# Altium PCB SWDM-21DD8_LV_XX_V1.PcbDoc (part 2 of 2)
Units mil, origin at the board's own origin, x right, y up, seen from the top; angles counter-clockwise.
Board outline 3898.56 x 2933.86 mil, 2 copper layers (Top, Bottom), stack 12.7 mil thick; 138 components, 69 nets, 322 pads, 492 vias.
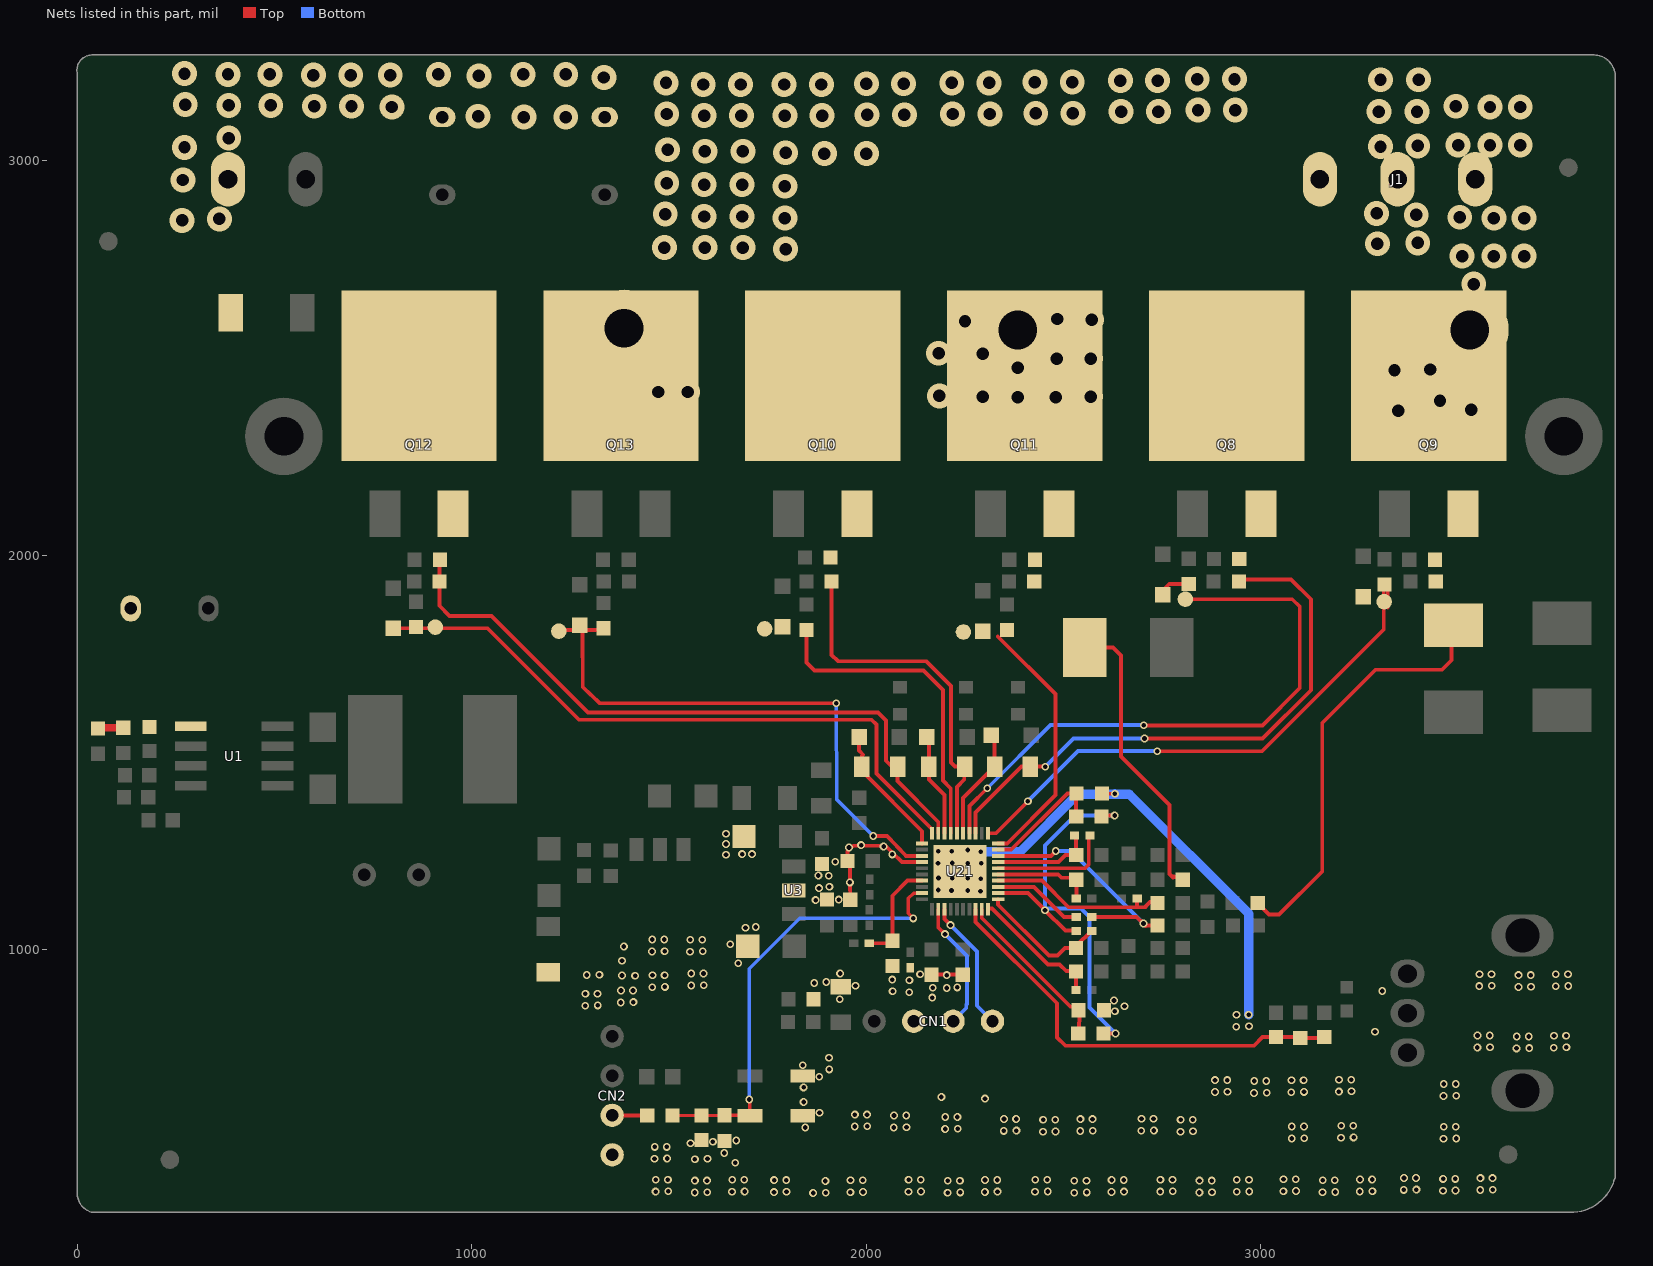
[diagram p2: the nets of this part, all layers, seen from the top]

## Via types
v1: diameter 19.68, hole 11.81, Top to Bottom, 314 vias
v2: diameter 62.99, hole 31.5, Top to Bottom, 174 vias
v3: diameter 39.37, hole 19.68, Top to Bottom, 4 vias

## Nets (pads, with @x,y where several pads share a name; then routed paths per layer and width w, separated by ;. In a path a pad name is that pad's centre, name@x,y a point inside that pad or via, vN(x,y) a via of type N, cw(c..) or ccw(c..) an arc to the next point about the centre after c; other vN are vias at no path point) (continued)
GND: C5.1 C7.1 C9.1 C10.1 C14.2 C15.1 C17.2 C21.2 C22.1 C23.1 C50.1 C65.2 C69.1 CN1.2 CN2.1 R11.2 R34.2 R81.2 R112.2 U3.2 U21.14 U21.41 ZD1.1 ZD2.1 | length 1575.1
  Top w9.84: C21.2@1959.06,1126.49 1958.68,1170.48 1958.27,1218.79 C7.1@1952.25,1224.8 1952.25,1248.71 1959.25,1255.71 1966.93,1263.39 2048.43,1263.39 2080.91,1230.91 2081.3,1230.91 2090.16,1222.05 U21.14@2140.94,1222.05 ; C69.1@2597.24,1395.67 v1(2629.92,1394.88)
  Top w10.24: C10.1@1900,1126.77 C10.1@1903.65,1130.43 ; C15.1@2165.35,936.5 C22.1@2244.09,936.5
  Bottom w23.62: v1(2290.16,1248.43) 2389.76,1248.43 2535.43,1394.09 2575.59,1394.09 v1@2629.13,1394.09 ; v1(2629.92,1394.88) v1@2629.13,1394.09 ; v1(2968.9,835.04) 2968.9,1091.34 2666.14,1394.09 v1@2629.13,1394.09
  other v1: 1864.96,383.07 1896.85,383.86 2205.91,383.86 2526.77,383.86 1564.96,384.25 2237.8,384.65 2558.66,384.65 2844.09,384.25 1596.85,385.04 1765.75,385.43 1959.45,385.04 1991.34,385.83 2300.39,385.83 2621.26,385.83 2875.98,385.04 3156.3,385.04 3188.19,385.83 1465.75,386.61 1659.45,386.22 1797.64,386.22 2106.69,386.22 2332.28,386.61 2427.56,386.22 2653.15,386.61 2744.88,386.61 2938.58,386.22 1497.64,387.4 1691.34,387.01 2138.58,387.01 2459.45,387.01 2776.77,387.4 2970.47,387.01 3057.09,387.4 3250.79,387.01 3282.68,387.8 3088.98,388.19 3461.42,388.58 3493.31,389.37 3555.91,390.55 3362.2,390.94 3394.09,391.73 3587.8,391.34 1896.06,413.39 1565.35,414.57 1596.06,414.57 2206.3,414.17 2237.01,414.17 2527.17,414.17 2557.87,414.17 2844.49,414.57 2875.2,414.57 1766.14,415.75 1796.85,415.75 1959.84,415.35 1990.55,415.35 3156.69,415.35 3187.4,415.35 1659.84,416.54 1690.55,416.54 2107.09,416.54 2137.8,416.54 2300.79,416.14 2331.5,416.14 2427.95,416.54 2458.66,416.54 2621.65,416.14 2652.36,416.14 2938.98,416.54 2969.68,416.54 1466.14,416.93 1496.85,416.93 2745.28,416.93 2775.98,416.93 3057.48,417.72 3088.19,417.72 3251.18,417.32 3281.89,417.32 3461.81,418.9 3492.52,418.9 3556.3,420.87 3587.01,420.87 3362.6,421.26 3393.31,421.26 1667.72,459.84 1565.35,468.9 1462.99,469.69 1597.24,469.69 1494.88,470.47 1639.76,484.65 1463.39,500 1494.09,500 1554.33,509.45 1611.02,512.99 1670.08,516.14 3462.99,520.47 3077.95,521.26 3494.88,521.26 3109.84,522.05 3203.15,523.23 3235.04,524.02 2447.64,538.19 2796.06,538.58 2479.53,538.98 2827.95,539.37 2348.43,540.55 2542.13,540.16 2380.32,541.34 2574.02,540.94 2696.85,540.94 2728.74,541.73 2199.61,545.28 2231.5,546.06 1845.28,549.21 2069.68,549.21 2101.57,550 3463.39,550.79 3494.09,550.79 1970.47,551.57 3078.35,551.57 3109.06,551.57 2002.36,552.36 3203.54,553.54 3234.25,553.54 2448.03,568.5 2478.74,568.5 2796.46,568.9 2827.17,568.9 2348.82,570.87 2379.53,570.87 2542.52,570.47 2573.23,570.47 2697.24,571.26 2727.95,571.26 2200,575.59 2230.71,575.59 2070.08,579.53 2100.79,579.53 1970.87,581.89 2001.57,581.89 1881.1,586.61 1840.94,613.78 2300.79,622.44 2190.16,626.38 3462.99,629.13 3494.88,629.92 2982.68,636.61 3014.57,637.4 3077.17,638.58 2883.46,638.98 2915.35,639.76 3109.06,639.37 3197.64,640.16 3229.53,640.94 1840.94,650.79 3463.39,659.45 3494.09,659.45 2983.07,666.93 3013.78,666.93 3077.56,668.9 3108.27,668.9 2883.86,669.29 2914.57,669.29 3198.03,670.47 3228.74,670.47 1880.71,677.95 1905.91,696.46 1838.58,707.09 1905.12,725.98 3648.03,749.61 3679.92,750.39 3742.52,751.57 3548.82,751.97 3580.71,752.76 3774.41,752.36 3648.43,779.92 3679.13,779.92 3742.91,781.89 3773.62,781.89 3549.21,782.28 3579.92,782.28 3289.37,792.13 2937.8,804.72 2969.68,805.51 2938.19,835.04 2629.92,843.7 2654.33,856.69 1287.4,857.87 1319.29,858.66 1377.56,866.14 1409.45,866.93 2627.56,870.87 1932.28,874.02 2166.93,878.35 1287.8,888.19 1318.5,888.19 2108.66,892.13 2066.54,894.49 3307.87,895.28 1377.95,896.46 1408.66,896.46 2203.94,902.76 2168.11,903.15 1457.48,904.72 2230.32,904.33 1489.37,905.51 3652.76,905.12 3684.65,905.91 3553.54,907.48 3747.24,907.09 3779.13,907.87 1972.44,908.27 3585.43,908.27 1555.91,909.06 1587.8,909.84 1868.11,915.35 1898.03,918.11 2109.06,922.44 2065.35,924.02 1413.78,933.86 1380.71,934.25 1291.34,935.83 1457.87,935.04 1488.58,935.04 2203.94,935.43 3653.15,935.43 3683.86,935.43 1323.23,936.61 2136.22,937.8 3553.94,937.8 3584.65,937.8 3747.64,937.4 3778.35,937.4 1556.3,939.37 1587.01,939.37 1933.46,939.37 1675.2,965.35 1380.71,972.05 1553.15,994.88 1456.69,995.28 1585.04,995.67 1488.58,996.06 1385.43,1007.87 1654.72,1013.78 1457.09,1025.59 1487.8,1025.59 1553.54,1025.2 1584.25,1025.2 1693.7,1055.51 1719.68,1057.48 1871.26,1125.59 1929.92,1126.77 2289.37,1147.64 2215.75,1150 2256.69,1150 2182.28,1151.18 1879.92,1155.91 1906.3,1159.45 1958.27,1170.47 2290.16,1179.53 2182.68,1181.5 2217.32,1181.1 2256.69,1181.1 1878.35,1187.8 1904.72,1187.01 2290.94,1218.9 2181.5,1219.29 2217.32,1219.69 2256.69,1219.29 1920.87,1222.83 1644.09,1240.55 2065.75,1241.34 1685.04,1242.13 1710.24,1242.13 2181.89,1249.61 2216.54,1249.21 2256.69,1252.36 1955.91,1259.06 2043.7,1261.42 1986.61,1264.96 1644.09,1267.72 1644.09,1293.7
HB1: C96.1 D4.2 U21.11 | length 338.7
  Top w9.84: D4.2@1981.5,1538.98 1981.5,1504.72 1992.13,1494.09 1988.58,1490.55 C96.1@1988.58,1463.78 1993.7,1458.66 1993.7,1447.24 2140.94,1300 U21.11@2140.94,1269.29
HB2: C11.1 D7.2 U21.8 | length 262.5
  Top w9.84: D7.2@2153.54,1538.98 2158.27,1534.25 C11.1@2158.27,1463.78 2158.27,1431.5 2198.03,1391.73 U21.8@2198.03,1294.88
HB3: C8.1 D9.2 U21.5 | length 285.4
  Top w9.84: U21.5@2245.28,1294.88 2245.28,1383.86 C8.1@2325.2,1463.78 2325.2,1535.43 D9.2@2316.14,1542.91
IBUSDET: C50.2 R20.2 U21.29 | length 435.6
  Top w9.84: U21.29@2292.52,1101.97 2292.52,1080.31 2517.69,855.14 2537.37,855.14 C50.2@2537.4,846.46 2541.62,849.32 2541.4,846.18 R20.2@2537.29,787.4
IV: C55.1 Q11.3 R26.1 R43.1 RS3.2 | length 744.7
  Top w10.24: RS3.2@2553.54,1766.14 2625.2,1766.14 2645.67,1745.67 2645.67,1489.37 2768.11,1366.93 2768.11,1192.13 2777.17,1183.07 2779.53,1185.43 R26.1@2801.69,1177.17
IW: C57.1 Q9.3 R7.1 R31.1 RS2.2 | length 1082.1
  Top w9.84: R31.1@2991.84,1118.11 3020.98,1088.98 3046.06,1088.98 3155.51,1198.43 3155.51,1574.8 3290.16,1709.45 3459.45,1709.45 3483.46,1733.46 3483.46,1817.72 RS2.2@3488.19,1822.44
OC: C69.2 R15.2 U21.39 | length 315.8
  Top w9.84: U21.39@2333.86,1253.54 2367.32,1253.54 2509.45,1395.67 C69.2@2532.28,1395.67 2531.78,1395.17 R15.2@2531.78,1337.4
OPA0+: R49.2 R137.1 U21.30 | length 337.6
  Top w7.87: U21.30@2308.27,1101.97 2308.46,1101.97 U21.30@2311.02,1104.53
  Top w9.84: 2489.76,962.6 2506.69,945.67 2530.6,945.67 R49.2@2531.39,944.88 2531.5,944.77 R137.1@2531.5,897.64
  Top w10.24: U21.30@2311.02,1104.53 2317.91,1104.53 2459.84,962.6 2489.76,962.6
OPA0-: R48.2 R52.2 U21.31 | length 334
  Top w9.84: U21.31@2333.86,1127.56 2333.86,1113.78 2462.99,984.65 2484.25,984.65 2503.54,1003.94 R48.2@2531.39,1003.94 2531.39,1010.91 R52.2@2571.65,1047.24
OPA0-OUT: R15.1 R20.1 R52.1 U21.32 | length 1124.5
  Top w9.84: U21.32@2333.86,1143.31 2409.45,1143.31 2452.76,1100 v1(2452.76,1099.61) 2453.15,1099.61 2504.72,1048.03 2529.53,1048.03 2530.32,1047.24 R52.1@2532.28,1047.24 ; R15.1@2595.78,1337.4 2598.54,1340.16 v1(2629.13,1340.16) ; R20.1@2601.29,787.4 v1(2631.5,787.4)
  Bottom w9.84: v1(2629.13,1340.16) 2628.74,1339.76 2528.74,1339.76 2452.76,1263.78 v1(2452.76,1099.61) 2453.15,1100 2453.15,1104.33 2544.49,1104.33 2565.75,1083.07 2565.75,853.15 v1(2631.5,787.4)
OPA1+: R25.2 R29.1 U21.34 | length 461.5
  Top w9.84: U21.34@2333.86,1174.8 2444.88,1174.8 2512.2,1107.48 2686.22,1107.48 ; R29.1@2686.22,1129.92 2686.22,1107.48 ; R25.2@2737.68,1118.11 2735.05,1118.71 2733.4,1120.37 2718.61,1120.37 2707.87,1109.64 2707.87,1107.48 2686.22,1107.48
OPA1-: R24.2 R28.2 U21.38 | length 626.1
  Top w9.84: U21.38@2333.86,1237.8 2467.72,1237.8 v1(2479.92,1250) ; R28.2@2571.65,1082.68 2685.43,1082.68 v1@2702.36,1065.75 ; v1(2702.36,1066.14) v1@2702.36,1065.75 ; R24.2@2737.68,1061.02 2709.45,1061.02 2708.27,1059.84 v1@2702.36,1065.75
  Bottom w9.84: v1(2479.92,1250) 2518.5,1250 v1(2702.36,1066.14)
OPA1-OUT: R28.1 U21.33 | length 230.1
  Top w9.84: U21.33@2333.86,1159.06 2424.8,1159.06 2501.18,1082.68 R28.1@2532.28,1082.68
OPA2+: R16.2 R22.1 U21.35 | length 252.9
  Top w9.84: U21.35@2333.86,1190.55 2486.22,1190.55 2494.68,1182.09 2530.8,1182.09 R16.2@2531.78,1177.17 2532.28,1176.66 R22.1@2532.28,1129.92
OPA2-: R13.2 R19.2 U21.37 | length 256.4
  Top w9.84: U21.37@2333.86,1222.05 2487.01,1222.05 2505.12,1240.16 R13.2@2531.78,1240.16 2531.78,1285.15 R19.2@2527.56,1289.37
OPA2-OUT: R19.1 U21.36 | length 309.8
  Top w9.84: U21.36@2333.86,1206.3 2554.33,1206.3 2563.78,1215.75 2563.78,1287.95 2564.49,1288.66 2564.49,1288.9 R19.1@2566.93,1289.37
PWM: C14.1 R34.1 R35.2 U21.19 ZD2.2 | length 1143.2
  Top w8.66: R35.2@1508.38,579.53 1647.24,579.53 C14.1@1646.46,580.31 ; C14.1@1640.16,580.31 C14.1@1646.46,580.31 ; v1(1703.15,620.08) 1704.72,618.5 ZD2.2@1704.72,578.74 1703.15,580.31 C14.1@1646.46,580.31 ; v1(2118.9,1079.13) 2106.3,1091.73 2106.3,1129.92 2119.68,1143.31 U21.19@2140.94,1143.31
  Bottom w8.66: v1(1703.15,620.08) 1703.15,951.18 1831.1,1079.13 v1(2118.9,1079.13)
SWCLK: CN1.3 U21.22 | length 328
  Top w9.84: U21.22@2182.28,1101.97 2182.28,1056.3 v1(2199.21,1039.37)
  Bottom w9.84: v1(2199.21,1039.37) 2254.72,983.86 2254.72,862.6 2253.22,861.09 2253.22,852.03 CN1.3@2219.68,818.5
SWDIO: CN1.4 U21.23 | length 333.9
  Top w9.84: U21.23@2198.03,1101.97 2198.03,1077.56 v1(2213.39,1062.2)
  Bottom w9.84: v1(2213.39,1062.2) 2280.32,995.28 2280.32,857.87 CN1.4@2319.68,818.5
U: C3.1 C96.2 J1.1 Q12.3 Q13.2 R51.1 T1.1 U21.9 | length 1849.8
  Top w9.84: R51.1@919.29,1933.07 R51.1@917.83,1933.07 ; C3.1@919.29,1988.19 917.83,1986.72 R51.1@917.83,1939.83 ; R51.1@920.8,1939.83 R51.1@917.83,1939.83 ; v2(1547.24,2413.39) 1549.72,2410.91 Q13.2@1549.72,2291.34 ; U21.9@2182.28,1294.88 2182.28,1323.62 2078.74,1427.17 2078.74,1463.39 C96.2@2079.13,1463.78 2072.05,1463.78 2068.5,1460.24 2050,1478.74 2050,1581.1 2029.92,1601.18 1294.09,1601.18 1049.61,1845.67 943.81,1845.67 917.83,1871.65 R51.1@917.83,1933.07 ; R51.1@917.83,1933.07 R51.1@917.83,1939.83
  other v2: 1472.44,2413.39
U1-RST: C17.1 R30.2 U21.17 | length 271.2
  Top w9.84: R30.2@2007.09,1016.14 2064.57,1016.14 2064.57,1020.58 C17.1@2066.54,1022.55 2062.99,1035.43 2066.14,1038.58 2066.14,1136.61 2104.33,1174.8 U21.17@2140.94,1174.8
U-H: D10.2 R65.1 U21.10 U-H.1 | length 1660
  Top w9.84: D10.2@800.79,1814.17 801.18,1814.57 1039.76,1814.57 1271.65,1582.68 2013.39,1582.68 2025.59,1570.47 2025.59,1446.06 2166.54,1305.12 U21.10@2166.54,1294.88
U-L: D5.2 R66.1 U21.13 U-L.1 | length 1453.9
  Top w9.84: U-L.1@1220.47,1807.09 1223.91,1810.52 D5.2@1280.72,1810.52 ; D5.2@1273.62,1822.05 1280.32,1815.35 1280.71,1814.17 1280.71,1812.99 D5.2@1280.72,1810.52 ; R66.1@1334.25,1814.06 R66.1@1333.46,1814.85 1314.17,1810.52 D5.2@1280.72,1810.52 ; v1(1923.62,1624.41) 1324.41,1624.41 1281.1,1665.75 D5.2@1280.72,1810.52 ; v1(2017.32,1288.19) 2052.56,1288.19 2100.59,1237.8 U21.13@2140.94,1237.8
  Bottom w9.84: v1(1923.62,1624.41) 1924.91,1380.82 v1(2017.32,1288.19)
V: C11.2 C54.1 J1.2 Q10.3 Q11.2 R21.1 T3.1 U21.6 | length 930.3
  Top w9.84: R21.1@1911.92,1933.07 1911.92,1747.24 1928.06,1731.1 2151.18,1731.1 2214.17,1668.11 2214.17,1474.8 2224.8,1464.17 2248.43,1464.17 C11.2@2248.82,1463.78 2248.03,1462.99 2248.03,1431.1 2229.53,1412.6 U21.6@2229.53,1294.88
  other v2: 2383.86,2399.61 2480.32,2399.61 2295.28,2401.57 2568.9,2401.57 2185.04,2403.54 2383.86,2474.41 2482.28,2498.03 2568.9,2498.03 2295.28,2509.84 2183.07,2511.81 2250,2592.52 2570.87,2596.46 2484.25,2598.43 3295.28,2789.37 3397.64,2791.34 3393.7,2862.2 3293.31,2866.14 3303.15,3035.43 3397.64,3037.4 3299.21,3124.02 3395.67,3124.02 3303.15,3204.72 3399.61,3204.72
V-H: D22.2 R63.1 U21.7 V-H.1 | length 828.6
  Top w9.84: R63.1@1848.43,1810.52 1848.43,1727.56 1868.9,1707.09 2144.88,1707.09 2194.09,1657.87 2194.09,1428.35 2213.78,1408.66 U21.7@2213.78,1294.88
V-L: D23.2 R64.1 U21.40 V-L.1 | length 666.5
  Top w9.84: 2332.91,1793.98 2336.33,1790.55 2479.33,1647.56 2479.33,1391.54 2357.09,1269.29 U21.40@2333.86,1269.29 ; R64.1@2356.3,1810.52 2359.84,1806.98 R64.1@2359.84,1804.72
VDD: C16.1 C19.1 C25.2 C29.1 D8.1 J6.1 Q8.2 Q10.2 Q12.2 R8.2 R80.2 U1.1 | length 64.8
  Top w19.68: R80.2@52.36,1560.74 53.94,1562.31 C25.2@116.54,1562.31
  other v2: 1795.28,2775.59 1488.19,2779.53 1590.55,2779.53 1687.01,2779.53 265.75,2848.43 360.24,2852.36 1793.31,2854.33 1588.58,2858.27 1685.04,2858.27 1490.16,2864.17 1793.31,2935.04 1588.58,2938.98 1685.04,2938.98 1494.09,2942.91 267.72,2950.79 1893.7,3017.72 2000,3017.72 1795.28,3019.69 1590.55,3023.62 1687.01,3023.62 1496.06,3027.56 271.65,3033.46 383.86,3057.09 1131.89,3110.24 1238.19,3110.24 1015.75,3112.2 1588.58,3114.17 1683.07,3114.17 1793.31,3114.17 1887.8,3114.17 2001.97,3116.14 2096.46,3116.14 1494.09,3118.11 2218.5,3118.11 2312.99,3118.11 2429.13,3120.08 2523.62,3120.08 2645.67,3124.02 2740.16,3124.02 2840.55,3127.95 2935.04,3127.95 797.24,3135.83 600.39,3137.8 694.88,3137.8 383.86,3139.76 490.16,3139.76 273.62,3141.73 1586.61,3192.91 1681.1,3192.91 1791.34,3192.91 1885.83,3192.91 2000,3194.88 2094.49,3194.88 1492.13,3196.85 2216.54,3196.85 2311.02,3196.85 2427.17,3198.82 2521.65,3198.82 2643.7,3202.76 2738.19,3202.76 2838.58,3206.69 2933.07,3206.69 1334.65,3210.63 1017.72,3214.57 598.43,3216.54 692.91,3216.54 793.31,3216.54 381.89,3218.5 488.19,3218.5 915.35,3218.5 1129.92,3218.5 1238.19,3218.5 271.65,3220.47
VSP: C39.1 R1.1 R14.1 U21.28 | length 1109.8
  Top w9.84: U21.28@2276.77,1101.97 2276.77,1070.47 2483.07,864.17 2483.07,777.56 2504.33,756.3 2982.28,756.3 3004.33,778.35 R1.1@3038.19,778.35 3096.85,778.35 C39.1@3099.61,775.59 3161.02,775.59 3161.02,777.95 R14.1@3160.63,778.35
VSP2: CN2.2 R35.1 | length 88.9
  Top w9.84: CN2.2@1355.51,579.92 1432.57,579.92 R35.1@1444.38,579.53
W: C8.2 C56.1 J1.3 Q8.3 Q9.2 R10.1 T4.1 U21.3 | length 1491.4
  Top w9.84: U21.3@2276.77,1294.88 2276.77,1347.64 2392.91,1463.78 C8.2@2415.75,1463.78 ; C8.2@2415.75,1445.67 C8.2@2415.75,1463.78 ; v1(2453.54,1463.78) C8.2@2415.75,1463.78 ; v1(2705.12,1535.04) 3004.33,1535.04 3126.77,1657.48 3126.77,1888.19 3076.38,1938.58 2950.39,1938.58 C56.1@2944.88,1933.07 C56.1@2943.7,1931.89 ; C56.1@2942.91,1931.1 C56.1@2943.7,1931.89 ; C56.1@2943.7,1928.23 C56.1@2943.7,1931.89
  Bottom w9.84: v1(2453.54,1463.78) 2524.8,1535.04 v1(2705.12,1535.04)
  other v2: 3348.43,2366.14 3533.46,2368.11 3453.94,2390.94 3338.58,2468.5 3429.13,2470.47 3539.37,2687.01 3509.84,2757.87 3590.55,2757.87 3667.32,2757.87 3590.55,2854.33 3667.32,2854.33 3503.94,2856.3 3500,3039.37 3580.71,3039.37 3657.48,3039.37 3580.71,3135.83 3657.48,3135.83 3494.09,3137.8
W-H: D24.2 R58.1 U21.4 W1-H.1 | length 1619.8
  Top w9.84: U21.4@2261.02,1294.88 2261.02,1363.78 v1(2306.3,1409.06) ; v1(2703.15,1568.5) 3003.94,1568.5 3098.43,1662.99 3098.43,1869.29 3079.53,1888.19 W1-H.1@2808.66,1888.19 ; D24.2@2749.21,1901.97 D24.2@2750.79,1899.61 D24.2@2757.09,1916.07 ; D24.2@2757.07,1916.09 2767.64,1926.66 R58.1@2816.93,1926.66
  Bottom w9.84: v1(2306.3,1409.06) 2466.93,1569.69 2701.97,1569.69 v1(2703.15,1568.5)
W-L: D25.2 R59.1 U21.1 W1-L.1 | length 1400
  Top w9.84: U21.1@2308.27,1294.88 2328.35,1294.88 v1@2409.45,1375.98 ; v1(2737.4,1502.76) 3002.76,1502.76 3311.42,1811.42 3311.42,1923.91 R59.1@3312.99,1925.48 3321.66,1925.57 W1-L.1@3321.66,1867.2 ; v1@2409.45,1375.98 2409.65,1376.18 v1(2409.45,1376.38) v1@2409.45,1375.98
  Bottom w9.84: v1(2409.45,1376.38) 2536.22,1503.15 2737.01,1503.15 v1(2737.4,1502.76)
pads on no net: CN2.4 MARK1.1 MARK2.1 MARK3.1 MARK4.1 T2.1 T6.1 U21.24 U21.25 VR1.4 VR1.5

## Polygon pours and split planes (outlines as drawn)
GND on Top "Top-GND" (solid, remove dead copper, pour order 0): 2220,1260 1946.77,1260 1735.75,1048.98 1311.73,1048.98 1175.12,912.36 1175.12,352.91 3767.24,352.91 3882.2,480.08 3882.2,1109.61 2657.01,1109.61 2417.24,1259.61 2220,1259.61
GND on Bottom "Bottom-GND" (solid, remove dead copper, pour order 2): 2205,1315 1931.77,1315 1720.75,1316.18 1160.12,1320.12 1160.12,358.31 3752.24,358.31 3867.2,485.47 3867.2,1115 3023.11,1115 2838.46,1314.21 2205,1314.21

## Keep-outs
Keep-Out Layer:
  lines w10: 0,383.83 ccw(c48.6,381.62) 39.4,333.85 ; 0,383.86 0,3220.47 cw(c37.62,3229.15) 39.37,3267.72 3844.49,3267.72 ; 27.56,472.44 169.29,472.44 ; 39.37,333.86 3792.99,333.86 ccw(c3784.46,449.99) 3897.64,422.61 3897.64,3220.47 ; 39.37,3110.24 196.85,3110.24 ; 3708.66,472.44 3850.39,472.44 ; 3708.66,3110.24 3850.39,3110.24 ; 3844.46,3267.72 cw(c3843.5,3213.09) 3897.63,3220.5

## Other copper
Top:
  region net VDD: 237.71,3240.64 220.08,3222.92 220.08,3009.06 142.91,2932.28 142.91,1973.23 77.95,1895.67 77.95,1544.88 330.71,1544.88 330.71,1586.22 139.54,1586.1 136.03,1590.68 132.21,1599.89 130.91,1609.77 132.21,1619.65 136.03,1628.86 140.19,1634.28 140.22,1634.25 236.22,1635.43 236.22,2448.43 453.15,2589.76 453.15,3000 508.27,3055.12 1415.35,3055.12 1446.85,3023.62 1446.85,2877.17 1415.35,2845.67 708.66,2845.67 655.51,2792.52 655.51,2265.75 683.07,2238.19 1000,2238.19 1059.06,2297.24 1059.06,2651.57 1102.36,2694.88 1606.3,2694.88 1643.7,2657.48 1643.7,2291.34 1681.1,2253.94 2045.28,2253.94 2086.61,2295.28 2086.61,2683.07 2112.2,2708.66 2687.01,2708.66 2704.72,2690.94 2704.72,2269.69 2734.25,2240.16 3094.49,2240.16 3114.17,2259.84 3114.17,2633.86 3009.84,2751.97 3009.84,3186.69 2942.59,3253.61 237.71,3240.64
  region net COM: 3330.71,1640.16 3564.17,1640.16 3564.17,1414.57 3533.46,1383.86 3355.91,1383.86 3330.71,1409.06 3330.71,1640.16
  region net IW: 3546.06,2163.78 3419.68,2163.78 3419.68,1785.43 3590.55,1785.43 3590.55,2164.17 3546.06,2164.17 3546.06,2163.78
  region net $$$8: 790.55,2160.63 778.74,2148.82 778.74,2041.34 777.56,1998.03 777.56,1866.14 789.37,1854.33 860.24,1854.33 872.05,1866.14 872.05,2148.82 860.24,2160.63 790.55,2160.63
  region net A-GND: 519.68,3013.78 541.34,3035.43 1364.17,3035.43 1379.92,3019.69 1379.92,2894.88 1348.43,2863.39 557.09,2863.39 519.68,2900.79 519.68,3013.78
  region net $$$6: 1765.75,2185.04 1753.94,2173.23 1753.94,1883.86 1765.75,1872.05 1854.33,1872.05 1866.14,1883.86 1866.14,2173.23 1854.33,2185.04 1765.75,2185.04
  region net $$$14301: 485.04,1585.83 485.04,1515.75 549.21,1515.75 570.08,1536.61 735.83,1536.61 735.83,1608.66 507.87,1608.66 485.04,1585.83
  region net A-GND: 674.41,1220.47 674.41,1001.57 712.6,963.39 1102.56,963.39 1210.04,1070.87 1520.47,1070.87 1520.47,1199.21 1197.83,1199.21 1023.43,1024.8 805.51,1024.8 777.17,1053.15 777.17,1220.47 674.41,1220.47
  region net A-GND: 271.26,1761.81 271.26,1663.78 299.61,1635.43 345.28,1635.43 352.76,1627.95 352.76,1398.82 325.59,1371.65 308.66,1371.65 308.66,1114.96 779.64,1114.96 773.62,1321.65 644.09,1321.65 644.09,1472.44 462.99,1472.44 431.89,1503.54 431.89,1702.76 372.83,1761.81 271.26,1761.81
  region net 12V: 1527.17,1416.54 1520.08,1409.45 1520.08,1227.95 1564.96,1227.95 1564.96,1345.67 1571.65,1352.36 1686.61,1352.36 1692.13,1357.87 1692.13,1411.02 1686.61,1416.54 1527.17,1416.54
  region net $$$5: 3307.09,2163.39 3301.18,2157.48 3301.18,2035.04 3283.46,2017.32 3261.81,2017.32 3255.91,2011.42 3255.91,1978.35 3261.81,1972.44 3354.33,1972.44 3358.27,1968.5 3358.27,1923.23 3366.14,1915.35 3385.43,1915.35 3393.31,1923.23 3393.31,2159.45 3389.37,2163.39 3307.09,2163.39
  region net A-GND: 535.04,2590.94 269.29,2422.83 269.29,1751.97 381.1,1751.97 381.1,2089.37 381.5,2192.52 381.5,2370.87 512.2,2469.29 636.61,2469.29 636.61,2591.34 535.04,2591.34 535.04,2590.94
  region net V: 3271.65,3255.91 3255.91,3240.16 3255.91,2759.84 3297.24,2718.5 3391.73,2718.5 3438.98,2765.75 3438.98,3234.25 3417.32,3255.91 3271.65,3255.91
  region net IV: 2427.17,2185.04 2419.29,2177.17 2419.29,1835.43 2496.06,1754.33 2496.06,1698.03 2503.94,1690.16 2608.36,1690.16 2608.75,1953.52 2608.27,1953.57 2608.27,2177.17 2600.39,2185.04 2427.17,2185.04
  region net V-H: 1732.68,1830.31 1862.6,1830.31 1862.6,1785.04 1732.68,1785.04 1732.68,1830.31
  region net U: 3053.15,3255.91 3037.4,3240.16 3037.4,2755.91 3078.74,2714.57 3183.07,2714.57 3230.32,2761.81 3230.32,3234.25 3208.66,3255.91 3053.15,3255.91
  region net 15V: 980.71,1642.52 980.71,1375.2 840.55,1244.49 840.55,1156.69 903.54,1156.69 1108.66,1358.66 1108.66,1642.52 980.71,1642.52
  region net W: 3474.41,3236.22 3458.66,3220.47 3458.66,2718.5 3421.26,2667.32 3421.26,2531.5 3448.82,2503.94 3590.55,2503.94 3624.02,2537.4 3622.05,2543.31 3700.79,2679.13 3698.82,3210.63 3692.91,3216.54 3675.2,3236.22 3474.41,3236.22
  region net A-GND: 3651.18,2177.17 3880.71,2177.17 3880.71,1779.53 3651.18,1779.53 3651.18,2177.17
  region net $$$7: 2285.43,2163.39 2277.56,2155.51 2277.56,1868.11 2285.43,1860.24 2374.02,1860.24 2379.92,1866.14 2379.92,2151.57 2368.11,2163.39 2285.43,2163.39
  region net COM: 3668.5,1652.36 3668.5,1207.09 3877.56,1207.09 3877.56,1652.36 3668.5,1652.36
  region net W-H: 2731.89,1944.88 2833.07,1944.88 2833.07,1877.56 2731.89,1877.56 2731.89,1944.88
  region net $$$11024: 1803.15,1410.24 1793.31,1400.39 1793.31,1215.75 1808.27,1200.79 1826.38,1200.79 1833.86,1208.27 1833.86,1396.85 1820.47,1410.24 1803.15,1410.24
  region net 5V: 1785.04,1105.12 1785.04,985.04 1918.11,985.04 1918.11,1029.13 1931.89,1042.91 2033.46,1042.91 2033.46,1081.89 1880.71,1081.89 1869.68,1070.87 1869.68,1045.67 1862.6,1038.58 1834.25,1038.58 1826.77,1046.06 1826.77,1105.12 1785.04,1105.12
  region net V-L: 2224.41,1831.1 2381.1,1831.1 2381.1,1788.98 2224.41,1788.98 2224.41,1831.1
  region net U: 1187.01,2661.42 1116.14,2661.42 1094.49,2639.76 1094.49,2240.16 1072.83,2218.5 937.01,2218.5 897.64,2179.13 897.64,1919.29 923.23,1893.7 1167.32,1893.7 1216.54,1942.91 1216.54,2145.67 1253.94,2183.07 1545.28,2183.07 1572.83,2210.63 1572.83,2645.67 1555.12,2663.39 1187.01,2663.39 1187.01,2661.42
  region net GND: 1740.63,1305.33 1659.06,1317.72 1649.61,1308.27 1649.61,1069.69 1625.98,1046.06 1296.79,1046.06 1203.87,969.69 1165.75,969.69 1165.75,851.57 1177.95,839.37 1660.24,839.37 1730.32,909.45 1730.32,1102.36 1761.81,1133.86 1862.99,1133.86 1884.25,1112.6 1971.26,1114 1971.26,1235.43 1958.66,1248.03 1881.1,1248.03 1870.08,1237.01 1870.08,1183.46 1861.81,1175.2 1768.5,1175.2 1753.15,1190.55 1753.15,1281.5 1740.63,1305.33
  region net V: 2222.44,2669.29 2151.57,2669.29 2129.92,2647.64 2129.92,2242.13 2108.27,2220.47 1927.17,2220.47 1887.8,2181.1 1887.8,1940.94 1913.39,1915.35 2212.6,1915.35 2261.81,1964.57 2261.81,2175.2 2299.21,2212.6 2580.71,2212.6 2608.27,2240.16 2608.27,2653.54 2590.55,2671.26 2222.44,2671.26 2222.44,2669.29
  region net W: 3240.16,2669.29 3169.29,2669.29 3147.64,2647.64 3147.64,2242.13 3125.98,2220.47 2954.72,2220.47 2915.35,2181.1 2915.35,1948.82 2940.94,1923.23 3118.11,1923.23 3275.59,2082.04 3275.59,2161.42 3312.99,2198.82 3582.68,2198.82 3610.24,2226.38 3610.24,2653.54 3592.52,2671.26 3240.16,2671.26 3240.16,2669.29
  region net COM: 2762.99,1841.73 3066.93,1841.73 3066.93,1684.65 2762.99,1684.65 2762.99,1841.73
  region net W-L: 3233.46,1944.09 3331.89,1944.09 3331.89,1854.33 3233.46,1854.33 3233.46,1944.09
  region net $$$28194: 2887.4,2147.64 2871.65,2163.39 2740.16,2163.39 2730.32,2153.54 2730.32,1984.25 2738.19,1976.38 2846.46,1976.38 2852.36,1970.47 2852.36,1929.13 2862.2,1919.29 2877.56,1919.29 2887.4,1929.13 2887.4,2147.64
  region net $$$9: 1263.78,2161.42 1253.94,2151.57 1253.94,1883.86 1267.72,1870.08 1338.58,1870.08 1346.46,1877.95 1346.46,2149.61 1334.65,2161.42 1263.78,2161.42
  region net A-GND: 523.62,2996.06 523.62,2562.99 541.34,2545.28 622.05,2545.28 637.8,2561.02 637.8,2978.35 614.17,3001.97 529.53,3001.97 523.62,2996.06
  region net COM: 1606.3,2145.67 1588.58,2163.39 1393.7,2163.39 1379.92,2149.61 1379.92,1789.76 1397.64,1772.05 1586.61,1772.05 1606.3,1791.73 1606.3,2145.67
Bottom:
  region net A-GND: 507.87,3015.75 519.68,3027.56 1364.17,3027.56 1387.8,3003.94 1387.8,2897.02 1220.47,2711.81 1220.47,2364.96 1287.4,2298.03 3556.88,2298.03 3652.94,2185.43 3853.5,2185.43 3874.02,2153.02 3874.02,1875.01 3843.48,1805.51 3144.03,1805.51 2981.43,1975.2 1037.01,1975.2 834.65,2139.37 834.65,2713.39 797.24,2750.79 559.06,2750.79 507.87,2801.97 507.87,3015.75
  region net V: 3250,2795.28 3167.32,2702.76 2279.33,2702.76 2068.9,2511.45 2068.9,2397.64 2100.39,2366.14 3090.55,2366.14 3438.98,2669.29 3438.98,3234.25 3419.29,3253.94 3255.91,3253.94 3250,3228.35 3250,2795.28
  region net VDD: 246.06,2812.99 228.35,2830.71 228.35,3228.35 255.91,3255.91 3015.75,3255.91 3015.75,3118.11 3015.52,3070.87 2200.79,3070.87 1771.65,2718.5 1476.38,2718.5 1444.88,2750 1444.88,3049.21 1419.29,3074.8 513.78,3074.8 468.5,3029.53 468.5,2854.33 427.17,2812.99 246.06,2812.99
  region net W: 3480.32,3249.61 3454.72,3224.02 3454.72,2639.76 3287.4,2472.44 3287.4,2370.47 3324.8,2333.07 3566.93,2333.07 3592.52,2358.66 3592.52,2398.62 3698.82,2504.92 3698.82,3216.14 3665.35,3249.61 3480.32,3249.61
  region net U: 1340.55,2688.98 1281.5,2629.92 1281.5,2403.54 1343.34,2346.46 1793.65,2346.46 1816.69,2354.97 2259.84,2734.25 3157.48,2734.25 3220.47,2797.24 3220.47,3019.69 3192.91,3047.24 2196.85,3047.24 1781.5,2688.98 1340.55,2688.98
  region net COM: 1306.69,1937.01 2937.99,1937.01 3136.02,1738.98 3879.13,1738.98 3879.13,1161.42 3183.96,1161.42 2641.83,1703.54 1306.69,1703.54 1306.69,1937.01
Multi-Layer:
  lines w1: 1.97,-259.84 1.99,-259.84 ; 3863.39,328.35 3863.41,328.35 ; 3897.64,-291.34 3897.66,-291.34 ; 3929.13,3269.69 3929.16,3269.69
  lines w10: 1.97,-209.84 1.97,4.72 ; 1766.39,-45.28 1.97,-45.28 ; 2133.21,-45.28 3897.64,-45.28 ; 3897.64,-241.34 3897.64,4.72 ; 3913.39,328.35 4737.01,328.35 ; 3979.13,3269.69 4737.01,3269.69 ; 4687.01,1731.52 4687.01,328.35 ; 4687.01,1866.52 4687.01,3269.69 ; 1.97,-45.28 101.97,-70.28 101.97,-20.28 1.97,-45.28 ; 3897.64,-45.28 3797.64,-20.28 3797.64,-70.28 3897.64,-45.28 ; 4687.01,328.35 4712.01,428.35 4662.01,428.35 4687.01,328.35 ; 4687.01,3269.69 4662.01,3169.69 4712.01,3169.69 4687.01,3269.69
  text "74.7mm" at 4530.19,1761.52 h50
  text "99.0mm" at 1796.39,-82.78 h50

## Silkscreen, mask and mechanical layers (free items; w line width, h text height)
Silkscreen Top:
  drawing of 17266 lines, arcs and shapes, not listed
  text "V" at 3309.45,2746.85 h118.11
  text "U" at 3112.99,2741.73 h118.11
  text "W" at 3505.91,2739.37 h118.11
  text "U" at 1446.85,2704.72 h118.11
  text "V" at 2606.3,2631.89 h118.11
  text "24-60V" at 20,2580 h110.24
  text "SWDM-21DD8_LV_XX_V1.2" at 65,735 h90
  text "CLK" at 2200,699.21 h29.53
  text "GND" at 2080.32,697.24 h29.53
  text "SWDIO" at 2319.68,697.24 h29.53
  text "5V" at 1981.1,690.16 h29.53
  text "FG" at 1192.52,650 h78.74
  text "2023-7-26" at 50,625 h100
  text "PWM" at 1184.65,548.82 h78.74
  text "速度调节" at 3227.56,540.94 h78.74
  text "GND" at 1185.83,452.76 h78.74
Solder Mask Bottom:
  region: 3265.75,2783.07 3171.26,2688.58 2283.27,2688.58 2091.34,2507.52 2091.34,2412.6 2122.83,2381.1 3094.49,2381.1 3425.2,2676.38 3425.2,3198.82 3405.51,3218.5 3273.23,3218.5 3265.75,3189.76 3265.75,2783.07
  region: 1344.09,1920.87 2844.49,1920.87 3041.54,1699.61 3765.65,1699.61 3796.74,1669.42 3808.06,1284.34 3125.59,1284.34 2738.19,1677.56 2647.2,1748.21 2633.92,1752.76 1344.09,1752.76 1344.09,1920.87
  region: 3492.52,3216.54 3466.93,3190.94 3466.93,2609.65 3307.09,2442.32 3307.09,2403.54 3344.49,2366.14 3549.21,2366.14 3574.8,2391.73 3574.8,2398.62 3683.46,2504.92 3683.46,3183.07 3650,3216.54 3492.52,3216.54
  region: 1364.17,2668.9 1305.12,2609.84 1305.12,2413.39 1366.14,2358.27 1769.87,2358.27 1792.94,2366.8 2236.09,2746.85 3135.83,2746.85 3198.82,2809.84 3198.82,2997.24 3171.26,3024.8 2222.44,3024.8 1789.37,2668.9 1364.17,2668.9
  region: 262.6,2812.99 244.88,2830.71 244.88,3204.72 272.44,3232.28 3017.72,3232.28 3017.72,3118.11 3017.48,3081.1 2178.5,3081.1 1749.36,2728.35 1478.35,2728.35 1446.85,2759.84 1446.85,3076.77 1421.26,3102.36 499.21,3102.36 453.94,3057.09 453.94,2854.33 412.6,2812.99 262.6,2812.99
  region: 647.64,2775.2 868.9,2775.2 905.12,2738.98 905.12,2103.84 1029.13,1994.65 1204.58,1994.65 1193.16,2980.71 1177.17,3007.09 647.64,3007.09 647.64,2775.2
  region: 1264.57,2254.72 3563.78,2254.72 3594.88,2223.62 3594.88,1906.3 3113.78,1906.3 3085.04,1935.04 3085.04,1985.83 3063.39,2007.48 1264.57,2007.48 1264.57,2254.72
  region: 1664.17,1246.85 2353.54,1246.85 2409.06,1191.34 2409.06,1089.37 2444.09,1054.33 2513.78,1054.33 2533.46,1034.65 2533.46,787.01 2434.25,787.01 2312.6,908.66 2312.6,1085.43 2265.75,1132.28 1664.17,1132.28 1664.17,1246.85